# Altium PCB GreenMeter_VER1_PCB.PcbDoc
Units mm, origin at the board's own origin, x right, y up, seen from the top; angles counter-clockwise.
Board outline 50 x 22 mm, 4 copper layers (Top Layer, Mid Layer 1, Mid Layer 2, Bottom Layer), stack 1.57 mm thick; 4 components, 0 nets, 94 pads, 0 vias.
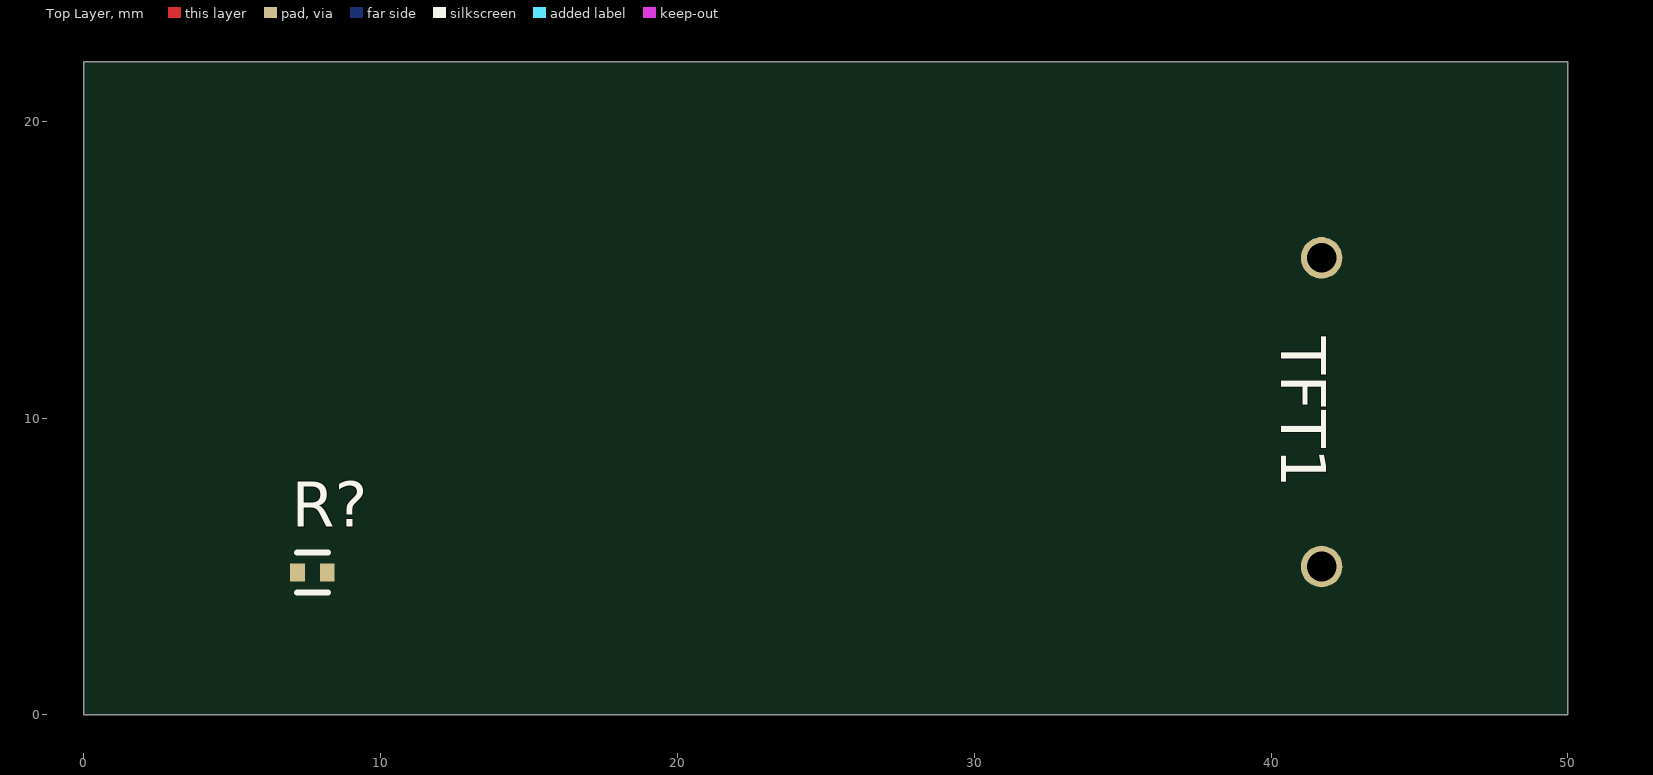
[diagram p0: Top Layer view]
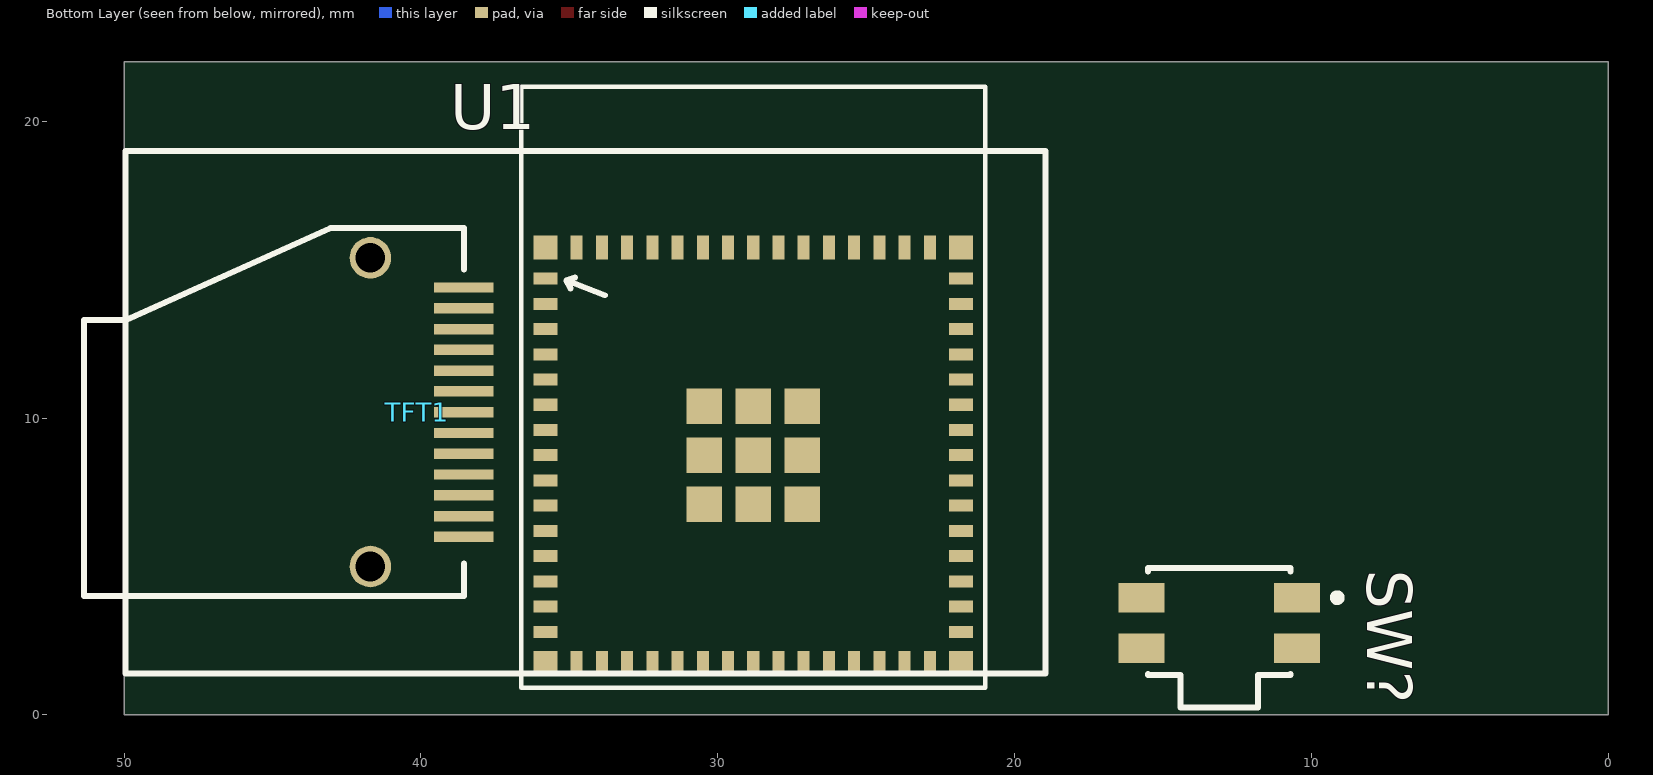
[diagram p1: Bottom Layer view, seen from below]

## Layer stack, top to bottom
Top Solder: solder mask 0.0127, Solder Resist, Dk 3.8
Top Layer: signal copper 0.035
Dielectric 1: prepreg 0.1, 2313, Dk 4.05
Mid Layer 1: signal copper 0.0175
Core: core 1.265, FR-4, Dk 4.5
Mid Layer 2: signal copper 0.0175
Dielectric 2: prepreg 0.1, 2313, Dk 4.05
Bottom Layer: signal copper 0.035
Bottom Solder: solder mask 0.0127, Solder Resist, Dk 3.8

## Board outline
0,0 50,0 50,22 0,22

## Design rules (kind name [scope] priority, off if disabled: settings)
Clearance [All] p1: gap=0.254 ignorepadtopadclearanceinfootprint=FALSE except(0: Arc-Hole Track-Hole SMDPad-Hole THPad-Hole Via-Hole Fill-Hole Poly-Hole Region-Hole Text-Hole)
PolygonConnect [All] p1: connectstyle=Relief reliefconductorwidth=0.254 reliefentries=4 polygonreliefangle="90 Angle" airgapwidth=0.254
RoutingVias [All] p1: holewidth=0.711 width=1.27 viastyle="Through Hole" minholewidth=0.711 minwidth=1.27 maxholewidth=0.711 maxwidth=1.27
SolderMaskExpansion [All] p1: expansion=0.102 istentingtop=FALSE
Width [All] p1: maxlimit=0.254 minlimit=0.254 preferedwidth=0.254
30 further rules are at their usual default settings.

## Classes and differential pairs
component class ESP32: R? TFT1 U1

## Components (designator, comment, footprint, x,y, rotation, side; value= is the part's Value field where it differs from the comment)
R? "RN73C1E1K78B" FP-RN731E-MFG 7.7,4.8 r0 top value=1.78KΩ
SW? "EVQ-PUA02K" FP-EVQ-PUA02K-MFG 13.1,2.6 r180 bottom
TFT1 "N114-2413THBIG01-H13" N114-2413THBIG01-H13 38.55,6 r90 top locked
U1 "ESP32-S2-MINI-2-N4R2" ESP32-S2-MINI-1-N4_EXP 28.8,11.039 r180 bottom

## Footprints (in the part's own frame and the unit in brackets; to place one, negate y for a bottom-side part, rotate by r counter-clockwise, add the part's x,y. Pads: shape width x height; smd on the part's side, far side on the other; paste and mask are expansions set on the pad)
ESP32-S2-MINI-1-N4_EXP [mil]
  rect 32x16 smd paste+0 mask+0: 1(-275.59,144.15) 2(-275.59,110.69) 3(-275.59,77.22) 4(-275.59,43.76) 5(-275.59,10.29) 6(-275.59,-23.17) 7(-275.59,-56.63) 8(-275.59,-90.1) 9(-275.59,-123.56) 10(-275.59,-157.03) 11(-275.59,-190.49) 12(-275.59,-223.96) 13(-275.59,-257.42) 14(-275.59,-290.89) 15(-275.59,-324.35) 31(275.59,-324.35) 32(275.59,-290.89) 33(275.59,-257.42) 34(275.59,-223.96) 35(275.59,-190.49) 36(275.59,-157.03) 37(275.59,-123.56) 38(275.59,-90.1) 39(275.59,-56.63) 40(275.59,-23.17) 41(275.59,10.29) 42(275.59,43.76) 43(275.59,77.22) 44(275.59,110.69) 45(275.59,144.15)
  rect 16x32 smd paste-16 mask-16: 16(-234.25,-365.69) 17(-200.79,-365.69) 18(-167.32,-365.69) 19(-133.86,-365.69) 20(-100.39,-365.69) 21(-66.93,-365.69) 22(-33.46,-365.69) 23(0,-365.69) 24(33.46,-365.69) 25(66.93,-365.69) 26(100.39,-365.69) 27(133.86,-365.69) 28(167.32,-365.69) 29(200.79,-365.69) 30(234.25,-365.69) 46(234.25,185.49) 47(200.79,185.49) 48(167.32,185.49) 49(133.86,185.49) 50(100.39,185.49) 51(66.93,185.49) 52(33.46,185.49) 53(0,185.49) 54(-33.46,185.49) 55(-66.93,185.49) 56(-100.39,185.49) 57(-133.86,185.49) 58(-167.32,185.49) 59(-200.79,185.49) 60(-234.25,185.49)
  rect 47x47 smd paste-23.5 mask-23.5: 61(0,-90.1) 66(-64.96,-25.14) 67(0,-25.14) 68(64.96,-25.14) 69(-64.96,-90.1) 70(64.96,-90.1) 71(-64.96,-155.06) 72(0,-155.06) 73(64.96,-155.06)
  rect 32x32 smd paste-16 mask-16: 62(-275.59,185.49) 63(-275.59,-365.69) 64(275.59,-365.69) 65(275.59,185.49)
  silkscreen extent -308,-399 308,399, body extent -303,-394 303,413, height 96
FP-EVQ-PUA02K-MFG [mm]
  rect 1.55x1 smd paste+0 mask+0: 1(2.625,1.35) 2(2.625,-0.35) 3(-2.625,1.35) 4(-2.625,-0.35)
  silkscreen extent -2.4,-2.35 4.1,2.35, body extent -3.2,-2.25 3.2,2.29, height 1.95
FP-RN731E-MFG [mm]
  rect 0.5x0.6 smd paste+0 mask+0: 1(-0.5,0) 2(0.5,0)
  silkscreen extent -0.53,-0.67 0.53,0.67, body extent -0.85,-0.4 0.85,0.4, height 0.25
N114-2413THBIG01-H13 [mm] "N114-2413THBIG01-H13"
  rect 0.35x2 smd far side: 2(7.7,0) 2(8.4,0) 3(7,0) 4(6.3,0) 5(5.6,0) 6(4.9,0) 7(4.2,0) 8(3.5,0) 9(2.8,0) 10(2.1,0) 11(1.4,0) 12(0.7,0) 13(0,0)
  round 1.4 hole 1 unplated: ""(-1,-3.15) ""(9.4,-3.15)
  body extent -4.58,-12.86 12.98,19.62, height 1.47

## Part data
R?: library part CMP-03211-005252-1, "Res Thin Film 0402 1.78KΩ 0.1% 1/16W 10ppm/°C Molded SMD", Manufacturer="TE Connectivity", Package=RN731E, Power Rating=0.063W, Resistance=1.78KΩ, Temperature="-55°C to +155°C", Temperature Coefficient=10ppm/°C, Temperature Range High=+155°C, Temperature Range Low=-55°C, Tolerance=0.1%, Voltage Rating=25V, Automotive=No, Category=Res, ComponentLink2Description=Datasheet, ComponentLink2URL=https://www.te.com/commerce/DocumentDelivery/DDEController?Action=showdoc&DocId=Data+Sheet%7F1773270%7FP%7Fpdf%7FEnglish%7FENG_DS_1773270_P.pdf%7F1-1879132-6, Composition="Thin Film", Device Class L1="Passive Components", Device Class L2=Resistors, Device Class L3="Chip SMD Resistors", Height=0.35mm, Ipc Land Pattern Name=RESC10050X30, Lead Free=Yes, Manufacturer Part Number=RN73C1E1K78B, Octopart=https://octopart.com/rn73c1e1k78b-te+connectivity-12153919, octopart_url=https://octopart.com/rn73c1e1k78b-te+connectivity-12153919, RoHS=TRUE, Series=RN73
SW?: library part CMP-05618-000133-1, "SWITCH TACTILE SPST-NO 0.05A 12V", Actuator Color=Black, Contact Current Rating=50mA, Contact Resistance=500mR, Max Operating Temperature=70°C, Max Voltage Rating (DC)=12V, Min Operating Temperature=-20°C, Operating Force=2.2N, Package Quantity=1, Actuator Length=1mm, Contact Plating=Gold, Current Rating=50mA, Depth=4.5mm, Electrical Life=100000Cycles, Illumination Type=Non-Illuminated, Lead Free="Lead Free", Length=6.4mm, Max Current Rating=50mA, Mechanical Life=100000Cycles, Mount="Surface Mount", Orientation=Straight, Packaging="Tape and Reel", Radiation Hardening=No, RoHS Compliant=Yes, Series=EVQPU, Size=3.5mm, Switch Function=Off-Mom, Switch Travel=0.3mm, Termination="Gull Wing", Throw Configuration=SPST, Voltage Rating (DC)=12V
TFT1: "ST7789", LCSC Part #=C2890618
U1: "No Description Available", LCSC Part #=C3013908, Mfr_Name="Espressif Systems", RefDes=RefDes, Type=Type

## Nets (pads, with @x,y where several pads share a name; then routed paths per layer and width w, separated by ;. In a path a pad name is that pad's centre, name@x,y a point inside that pad or via, vN(x,y) a via of type N, cw(c..) or ccw(c..) an arc to the next point about the centre after c; other vN are vias at no path point)
pads on no net: R?.1 R?.2 SW?.1 SW?.2 SW?.3 SW?.4 TFT1. TFT1.2 TFT1.3 TFT1.4 TFT1.5 TFT1.6 TFT1.7 TFT1.8 TFT1.9 TFT1.10 TFT1.11 TFT1.12 TFT1.13 U1.1 U1.2 U1.3 U1.4 U1.5 U1.6 U1.7 U1.8 U1.9 U1.10 U1.11 U1.12 U1.13 U1.14 U1.15 U1.16 U1.17 U1.18 U1.19 U1.20 U1.21 U1.22 U1.23 U1.24 U1.25 U1.26 U1.27 U1.28 U1.29 U1.30 U1.31 U1.32 U1.33 U1.34 U1.35 U1.36 U1.37 U1.38 U1.39 U1.40 U1.41 U1.42 U1.43 U1.44 U1.45 U1.46 U1.47 U1.48 U1.49 U1.50 U1.51 U1.52 U1.53 U1.54 U1.55 U1.56 U1.57 U1.58 U1.59 U1.60 U1.61 U1.62 U1.63 U1.64 U1.65 U1.66 U1.67 U1.68 U1.69 U1.70 U1.71 U1.72 U1.73